# EAGLE board PiezoPreamp_V4.b#8 (EAGLE 7.5.0)
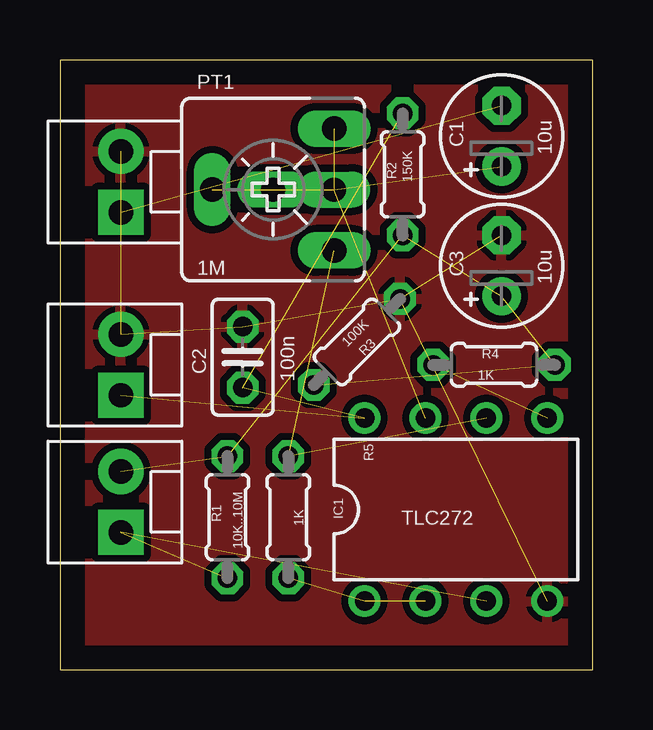
[diagram p0: board, top side]
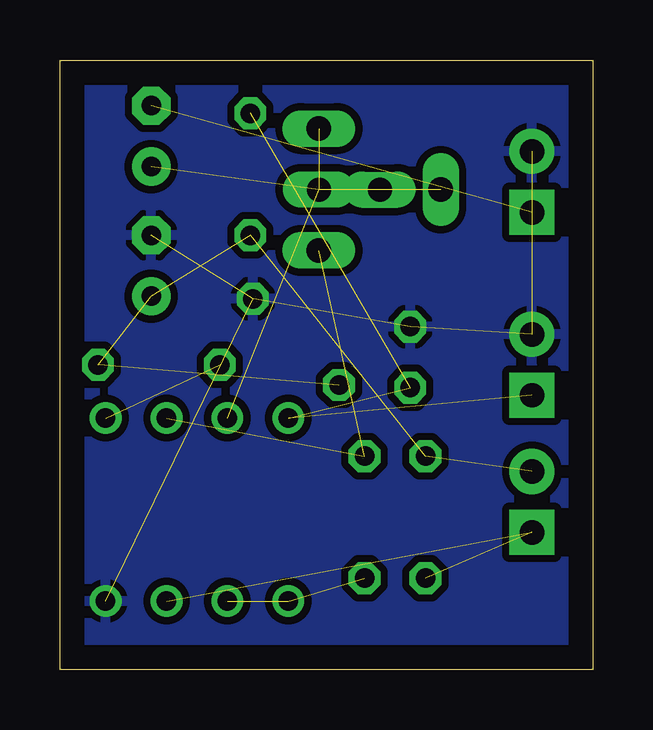
[diagram p1: board, bottom side, seen from below]

Size 22.23 x 25.4 mm. Coordinates in mm from the lower left corner, seen from the top.
Outline: 0,0 22.23,0 22.23,25.4 0,25.4 0,0
Copper layers (1*16): Top 0.035mm / dielectric 1.5mm / Bottom 0.035mm
Design rules "default": minimum track width 10mil, minimum drill 24mil, track to track 8mil, track to pad 8mil, pad to pad 8mil, via to via 8mil, smd to smd 8mil, copper to edge 40mil, drill to drill 8mil, minimum pad ring 10mil, minimum via ring 8mil, stop-mask expansion 4mil, vias tented up to drill 0mil, thermal gap 10mil

## Footprints (pad centres in the part's own frame; a part is rotated, then mirrored left to right if it is on the bottom)
E2,5-5 = drill 0.813 pad 1.6: + -1.27,0 | drill 0.813 pad 1.6 octagon: - 1.27,0
C025-025X050 = drill 0.813 octagon: 1 -1.27,0; 2 1.27,0
DIL08 = drill 0.813 pad 1.27: 1 -3.81,-3.81; 2 -1.27,-3.81; 3 1.27,-3.81; 4 3.81,-3.81; 5 3.81,3.81; 6 1.27,3.81; 7 -1.27,3.81; 8 -3.81,3.81
MOLEX-1X2 = drill 1.016 pad 1.88 square: 1 0,0 | drill 1.016 pad 1.88: 2 2.54,0
PAD127L1 = drill 1 long: P$2 0,0
CA6V = drill 1.016 long: A -2.54,-2.54; E 2.54,-2.54; S 0,2.54
0204/5 = drill 0.813 octagon: 1 -2.54,0; 2 2.54,0

## Placement (x,y rotation side)
C1  10u  [E2,5-5]  18.41,22.23 90 top
C2  100n  [C025-025X050]  7.62,13.02 270 top
C3  10u  [E2,5-5]  18.41,16.83 90 top
IC1  TLC272  [DIL08]  16.51,6.67 0 top
OUTPUT  M02POLAR  [MOLEX-1X2]  2.54,19.05 90 top
P1  PAD  [PAD127L1]  11.43,20 180 top
P2  PAD  [PAD127L1]  8.89,20 0 top
PIEZO-IN  M02POLAR  [MOLEX-1X2]  2.54,5.71 90 top
POWER  M02POLAR  [MOLEX-1X2]  2.54,11.43 90 top
PT1  1M  [CA6V]  8.89,20 90 top
R1  10K..10M  [0204/5]  6.99,6.35 90 top
R2  150K  [0204/5]  14.29,20.64 270 top
R3  100K  [0204/5]  12.38,13.65 225 top
R4  1K  [0204/5]  18.1,12.7 0 top
R5  1K  [0204/5]  9.53,6.35 270 top

## Library data of the parts
C1-C3 R1-R5 = rcl
IC1 = linear
OUTPUT PIEZO-IN POWER = SparkFun-Connectors
P1 P2 = 2martin
PT1 = pot

## Nets
GND: C2.1 C3.- IC1.4 OUTPUT.2 POWER.2 R3.1
N$2: IC1.6 PT1.A R5.1
N$3: C1.- OUTPUT.1
N$5: IC1.5 R4.1
N$6: C1.+ IC1.7 P1.P$2 P2.P$2 PT1.E PT1.S
N$14: IC1.1 IC1.2 R5.2
N$15: IC1.3 PIEZO-IN.1 R1.1
N$20: C3.+ PIEZO-IN.2 R1.2 R2.2 R3.2 R4.2
V9V: C2.2 IC1.8 POWER.1 R2.1

## Tracks (layer width: path | path; a pad name or v marks a point on that pad's centre or on a via)
GND  (5 unrouted)
  pour Bottom (isolate 0.305): 0,25.4 22.23,25.4 22.23,0 0,0
  pour Top (isolate 0.305): 0,25.4 22.23,25.4 22.23,0 0,0
N$2  (2 unrouted)
N$3  (1 unrouted)
N$5  (1 unrouted)
N$6  (5 unrouted)
N$14  (2 unrouted)
N$15  (2 unrouted)
N$20  (5 unrouted)
V9V  (3 unrouted)